# Altium PCB sensor_top_1117.PcbDoc
Units mil, origin at the board's own origin, x right, y up, seen from the top; angles counter-clockwise.
Board outline 6000 x 990 mil, 2 copper layers (Top Layer, Bottom Layer); 1 components, 1 nets, 16 pads, 0 vias.
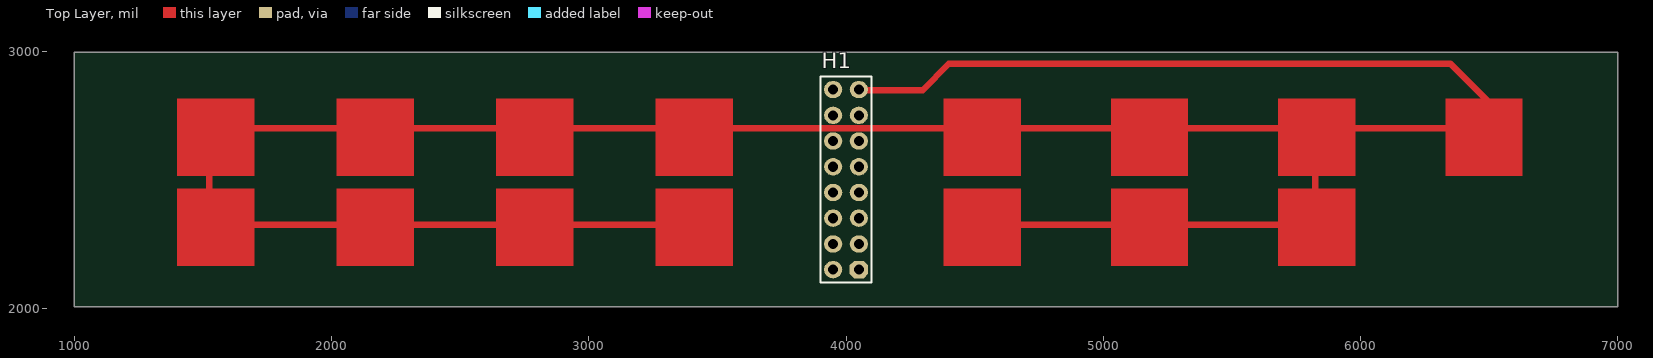
[diagram p0: Top Layer view]
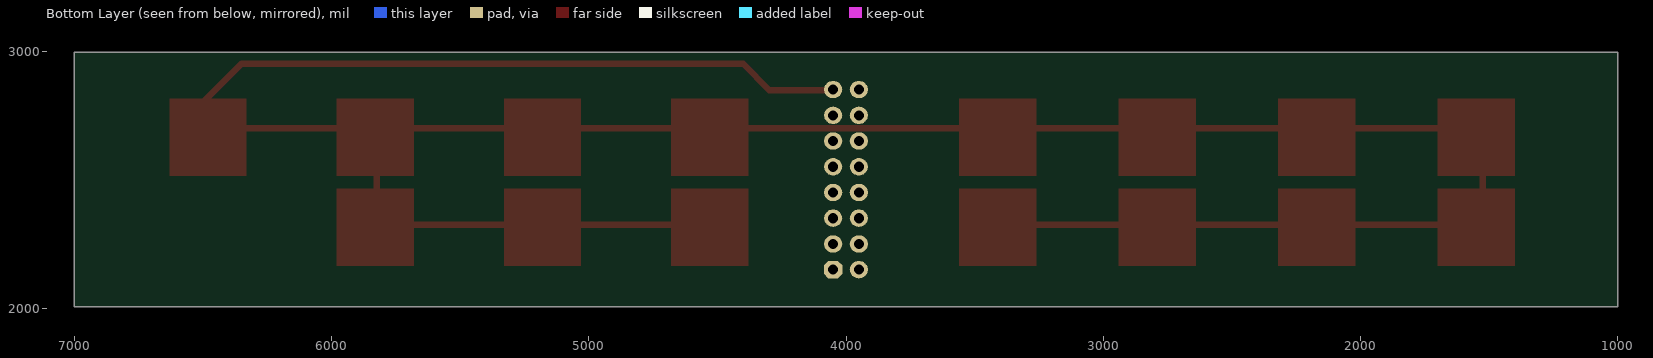
[diagram p1: Bottom Layer view, seen from below]

## Layer stack, top to bottom
Top Solder: solder mask 0.4, Solder Resist, Dk 3.5
Top Layer: signal copper 1.4
Dielectric 1: dielectric 12.6, FR-4, Dk 4.8
Bottom Layer: signal copper 1.4
Bottom Solder: solder mask 0.4, Solder Resist, Dk 3.5

## Board outline
1000,2005 7000,2005 7000,2995 1000,2995
board region "Default Layer Stack Region": 6994.13,2995 7000,2995 7000,2005 6991,2005
board region "Default Layer Stack Region": 6991,2005 1005,2005 1004.91,2995 6994.13,2995
board region "Default Layer Stack Region": 1005,2005 1000,2005 1000,2995 1004.91,2995

## Design rules (kind name [scope] priority, off if disabled: settings)
Clearance [All] p1: gap=10 ignorepadtopadclearanceinfootprint=FALSE except(0: Arc-Hole Track-Hole SMDPad-Hole THPad-Hole Via-Hole Fill-Hole Poly-Hole Region-Hole Text-Hole)
PolygonConnect [All] p1: connectstyle=Relief reliefconductorwidth=10 reliefentries=4 polygonreliefangle="90 Angle" airgapwidth=10
RoutingVias [All] p1: holewidth=28 width=50 viastyle="Through Hole" minholewidth=28 minwidth=50 maxholewidth=28 maxwidth=50
SolderMaskExpansion [All] p1: expansion=4
Width [All] p1: maxlimit=30 minlimit=10 preferedwidth=15
30 further rules are at their usual default settings.

## Components (designator, comment, footprint, x,y, rotation, side; value= is the part's Value field where it differs from the comment)
H1 "HEADER" HD_male_8x2_100mil_straight 4000,2500 r90 top

## Footprints (in the part's own frame and the unit in brackets; to place one, negate y for a bottom-side part, rotate by r counter-clockwise, add the part's x,y. Pads: shape width x height; smd on the part's side, far side on the other; paste and mask are expansions set on the pad)
HD_male_8x2_100mil_straight [mm]
  oct 1.7x1.8 hole 1: 1(-8.89,-1.27)
  oval 1.7x1.8 hole 1: 2(-8.89,1.27) 3(-6.35,-1.27) 4(-6.35,1.27) 5(-3.81,-1.27) 6(-3.81,1.27) 7(-1.27,-1.27) 8(-1.27,1.27) 9(1.27,-1.27) 10(1.27,1.27) 11(3.81,-1.27) 12(3.81,1.27) 13(6.35,-1.27) 14(6.35,1.27) 15(8.89,-1.27) 16(8.89,1.27)
  Mechanical 15 keep-out lines w0.1: -10.16,2.54 -10.16,-2.54 10.16,-2.54 10.16,2.54 -10.16,2.54
  silkscreen extent -10.16,-2.54 10.16,2.54, body extent -10.16,-2.54 10.16,2.54, height 8

## Part data
H1: library part HD_8x2, "Header, 8-pins/row, double row,"

## Nets (pads, with @x,y where several pads share a name; then routed paths per layer and width w, separated by ;. In a path a pad name is that pad's centre, name@x,y a point inside that pad or via, vN(x,y) a via of type N, cw(c..) or ccw(c..) an arc to the next point about the centre after c; other vN are vias at no path point)
GND: H1.1
pads on no net: H1.2 H1.3 H1.4 H1.5 H1.6 H1.7 H1.8 H1.9 H1.10 H1.11 H1.12 H1.13 H1.14 H1.15 H1.16
copper on no net: | length 11665.6
  Top Layer w10: 4050,2850 4052,2848 ; 6525,2700 6525,2775
  Top Layer w15: 2200,2225 2200,2250
  Top Layer w25: 1525,2325 3525,2325 ; 1525,2350 1525,2675 ; 1575,2700 6525,2700 ; 4052,2848 4298,2848 4400,2950 6350,2950 6525,2775 ; 4500,2325 5825,2325 ; 5825,2300 5825,2675

## Other copper
Top Layer:
  rectangle: 1400,2165 1700,2465
  rectangle: 3260,2515 3560,2815
  rectangle: 3260,2165 3560,2465
  rectangle: 2640,2515 2940,2815
  rectangle: 2640,2165 2940,2465
  rectangle: 2020,2515 2320,2815
  rectangle: 2020,2165 2320,2465
  rectangle: 1400,2515 1700,2815
  rectangle: 4380,2515 4680,2815
  rectangle: 4380,2165 4680,2465
  rectangle: 5030,2515 5330,2815
  rectangle: 5680,2515 5980,2815
  rectangle: 6330,2515 6630,2815
  rectangle: 5030,2165 5330,2465
  rectangle: 5680,2165 5980,2465